# EAGLE board HOTAS_THUMB_v5 (EAGLE 9.7.0)
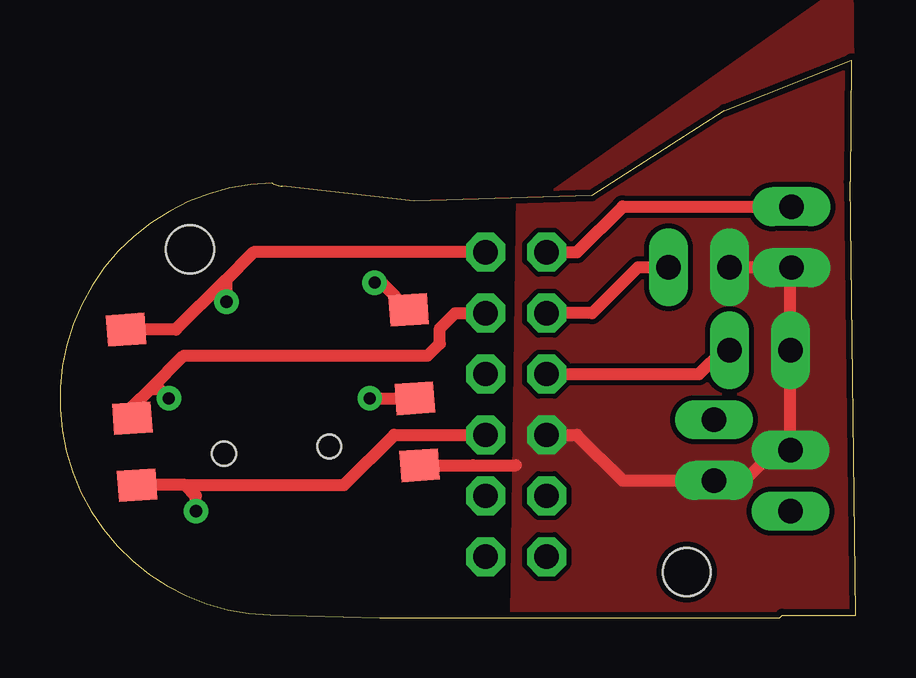
[diagram p0: board, top side]
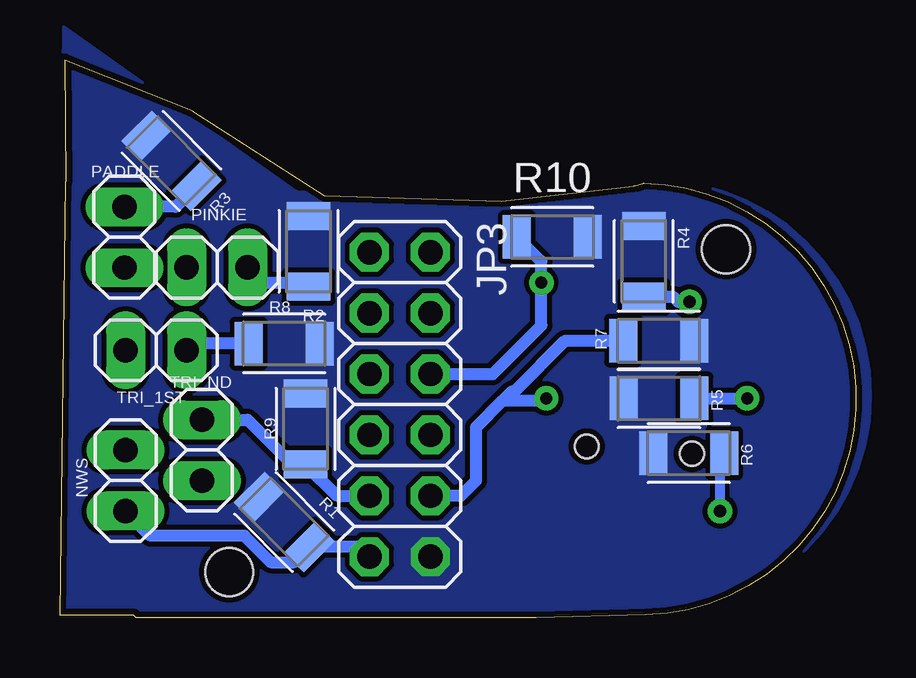
[diagram p1: board, bottom side, seen from below]

Size 33.17 x 23.26 mm. Coordinates in mm from the lower left corner, seen from the top.
Outline: 8.85,18.11 arc178 8.77,0.11 13.33,0 29.99,0 30.09,0.1 33.17,0.1 32.92,18.18 32.96,23.25 27.68,21.15 22.16,17.6 14.76,17.37 9.27,18 arc-25 8.85,18.11
Copper layers (1*16): Top 0.035mm / dielectric 1.5mm / Bottom 0.035mm
Design rules "SparkFun_modified": minimum track width 10mil, minimum drill 20mil, track to track 8mil, track to pad 8mil, pad to pad 8mil, via to via 8mil, smd to smd 8mil, copper to edge 10mil, drill to drill 8mil, minimum pad ring 12mil, minimum via ring 10mil, stop-mask expansion 4mil, vias tented up to drill 25mil, thermal gap 10mil
Holes 2 mm at 5.41,15.37 26.11,1.91

## Footprints (pad centres in the part's own frame; a part is rotated, then mirrored left to right if it is on the bottom)
2X06 = drill 1.016 octagon: 1 -6.35,-1.27; 2 -6.35,1.27; 3 -3.81,-1.27; 4 -3.81,1.27; 5 -1.27,-1.27; 6 -1.27,1.27; 7 1.27,-1.27; 8 1.27,1.27; 9 3.81,-1.27; 10 3.81,1.27; 11 6.35,-1.27; 12 6.35,1.27
1X02 = drill 1.016 long: 1 -1.27,0; 2 1.27,0
RESC3216X70 = smd 1.165 x 1.815: 1 -1.475,0; 2 1.475,0
FIVEWAYHATSSMD = smd 1.6 x 1.3: EN -11.05,6.5; P$2 -11.05,3.7; P$3 -11.05,0; P$4 0.75,0; P$5 0.75,6.5; P$6 0.75,3.7 | hole 1: -7.35,5.45; -2.95,5.45

## Placement (x,y rotation side)
JP3  PINHD-2X6  [2X06]  19,8.89 270 bottom
NWS  [1X02]  30.43,5.71 90 bottom
PADDLE  [1X02]  30.48,15.87 270 bottom
PINKIE  [1X02]  26.62,14.61 180 bottom
R1  [RESC3216X70]  23.82,3.99 135 bottom
R2  [RESC3216X70]  22.81,15.28 90 bottom
R3  [RESC3216X70]  28.53,19.05 135 bottom
R4  [RESC3216X70]  8.84,14.86 270 bottom
R5  [RESC3216X70]  8.21,9.14 0 bottom
R6  [RESC3216X70]  6.97,6.86 0 bottom
R7  [RESC3216X70]  8.22,11.55 0 bottom
R8  [RESC3216X70]  23.83,11.43 0 bottom
R9  [RESC3216X70]  22.94,7.87 90 bottom
R10  [RESC3216X70]  12.65,15.88 0 bottom
TRI_1ST  [1X02]  29.16,11.15 180 bottom
TRI_ND  [1X02]  27.26,6.99 270 bottom
U$1  FIVEWAYHATSSMD  [FIVEWAYHATSSMD]  3.51,12.06 184 top

## Library data of the parts
JP3 = Connector; CATEGORY: Headers; DESCRIPTION: Header, Straight, 2x6 Position; MANUFACTURER: Generic; MPN: Generic; OPERATING_TEMPERATURE: Generic; PART_STATUS: Active; PITCH: 0.100" (2.54mm); ROHS_COMPLIANCE: Generic; SERIES: Generic; SUB-CATEGORY: Headers, Male Pins; TYPE: Board to Board or Cable, Unshrouded, Through Hole, Straight
NWS PADDLE PINKIE TRI_1ST TRI_ND = MyStuff
R1-R10 = Resistor; CATEGORY: Resistor; SUB-CATEGORY: Fixed
U$1 = FiveWaySMD_V6

## Nets
CMS_DOWN: JP3.8 R6.2 U$1.P$5
CMS_LEFT: JP3.4 R5.2 U$1.P$6
CMS_PUSH: JP3.6 R10.1 U$1.P$3
CMS_RIGHT: JP3.10 R7.1 U$1.P$2
CMS_UP: JP3.2 R4.2 U$1.P$4
GND: JP3.7 NWS.2 PADDLE.2 PINKIE.2 TRI_1ST.2 TRI_ND.2 U$1.EN
NWS: JP3.11 NWS.1 R1.1
PADDLE: JP3.1 PADDLE.1 R3.1
PINKIE: JP3.3 PINKIE.1 R2.1
TRI_ND: JP3.9 R9.1 TRI_ND.1
TRI_ST: JP3.5 R8.1 TRI_1ST.1
VCC: JP3.12 R1.2 R2.2 R3.2 R4.1 R5.1 R6.1 R7.2 R8.2 R9.2 R10.2

## Tracks (layer width: path | path; a pad name or v marks a point on that pad's centre or on a via)
CMS_DOWN  (via drill 0.51)
  Top 0.508: v5.67,4.45 5.67,5.08 5.22,5.53 | 5.22,5.53 11.83,5.53 13.92,7.62 JP3.8 | 5.22,5.53 U$1.P$5 | U$1.P$5
  Bottom 0.406: R6.2 5.67,6.69 v5.67,4.45
CMS_LEFT  (via drill 0.51)
  Top 0.508: 3.76,9.53 5.16,10.92 15.32,10.92 15.83,11.43 15.83,12.06 16.46,12.7 JP3.4 | 3.76,9.53 4.15,9.53 v4.54,9.14 | 3.76,9.53 3.02,8.78 U$1.P$6
  Bottom 0.508: R5.2 v4.54,9.14
CMS_PUSH  (via drill 0.51)
  Top 0.508: U$1.P$3 13.4,13.97 v13.11,13.97
  Bottom 0.508: JP3.6 15.14,10.16 13.11,12.19 v13.11,13.97 13.11,14.86 R10.1
CMS_RIGHT  (via drill 0.51)
  Top 0.508: v12.91,9.14 U$1.P$2
  Bottom 0.508: JP3.10 16.46,5.08 15.83,5.71 15.83,7.94 14.72,9.05 | 14.72,9.05 13,9.05 v12.91,9.14 | 14.72,9.05 14.32,9.45 14.21,9.45 12.1,11.55 R7.1
CMS_UP  (via drill 0.51)
  Top 0.508: JP3.2 8.05,15.24 6.86,14.05 | 6.86,14.05 4.83,12.01 U$1.P$4 | 6.86,14.05 6.94,13.97 v6.94,13.17
  Bottom 0.508: R4.2 7.62,13.38 7.41,13.17 v6.94,13.17
GND
  Top 0.508: JP3.7 21.54,7.62 23.45,5.71 TRI_ND.2 28.53,5.71 29.8,6.99 NWS.2 TRI_1ST.2 30.43,14.55 PADDLE.2 | PINKIE.2 PADDLE.2 | PADDLE.2 | U$1.EN 17.2,6.35 17.21,6.35 19,6.35
  pour Top (no thermals): 18.82,0.08 33.28,0.08 32.99,26.62 20.45,17.72 20.45,17.72 20.44,17.71 20.44,17.71 20.43,17.71 20.42,17.7 20.41,17.7 20.41,17.7 20.4,17.7 19.08,17.7
NWS
  Bottom 0.508: JP3.11 20.68,2.94 R1.1 23.41,2.31 24.39,2.31 25.49,3.41 29.4,3.41 NWS.1
PADDLE
  Top 0.508: JP3.1 21.54,15.24 23.45,17.14 PADDLE.1
  Bottom 0.508: R3.1 28.35,17.14 PADDLE.1
PINKIE
  Top 0.508: PINKIE.1 24.08,14.61 22.18,12.7 JP3.3
  Bottom 0.508: PINKIE.1 24.72,13.97 22.98,13.97 R2.1
TRI_ND
  Bottom 0.508: TRI_ND.1 25.35,8.26 23.5,6.4 R9.1 21.62,5.08 JP3.9
TRI_ST
  Top 0.508: JP3.5 26.62,10.16 27.61,11.15 TRI_1ST.1
  Bottom 0.508: R8.1 27.61,11.43 TRI_1ST.1
VCC
  pour Bottom (no thermals): 13.41,0.08 33.28,0.08 33.01,24.64 23.31,17.76 23.31,17.76 23.3,17.76 23.29,17.75 23.29,17.75 23.28,17.75 23.27,17.75 23.26,17.74 23.26,17.75 14.69,17.45 14.68,17.45 14.68,17.45 14.67,17.45 14.66,17.45 12.66,17.84 10.63,18.09 8.59,18.21 7.56,18.18 6.55,18.03 5.57,17.77 4.61,17.4 3.71,16.92 2.87,16.34 2.1,15.67 1.41,14.92 0.81,14.09 0.31,13.2 -0.09,12.26 -0.37,11.28 -0.55,10.27 -0.6,9.25 -0.54,8.23 -0.37,7.22 -0.08,6.24 0.32,5.3 0.82,4.41 1.42,3.59 2.11,2.83 2.88,2.16 3.72,1.59 4.63,1.11 5.58,0.74 6.57,0.48 7.58,0.33 10.49,0.14